# Altium PCB PCB1.PcbDoc
Units mil, origin at the board's own origin, x right, y up, seen from the top; angles counter-clockwise.
Board outline 535 x 1635 mil, 2 copper layers (Top Layer, Bottom Layer); 11 components, 8 nets, 24 pads, 1 vias.
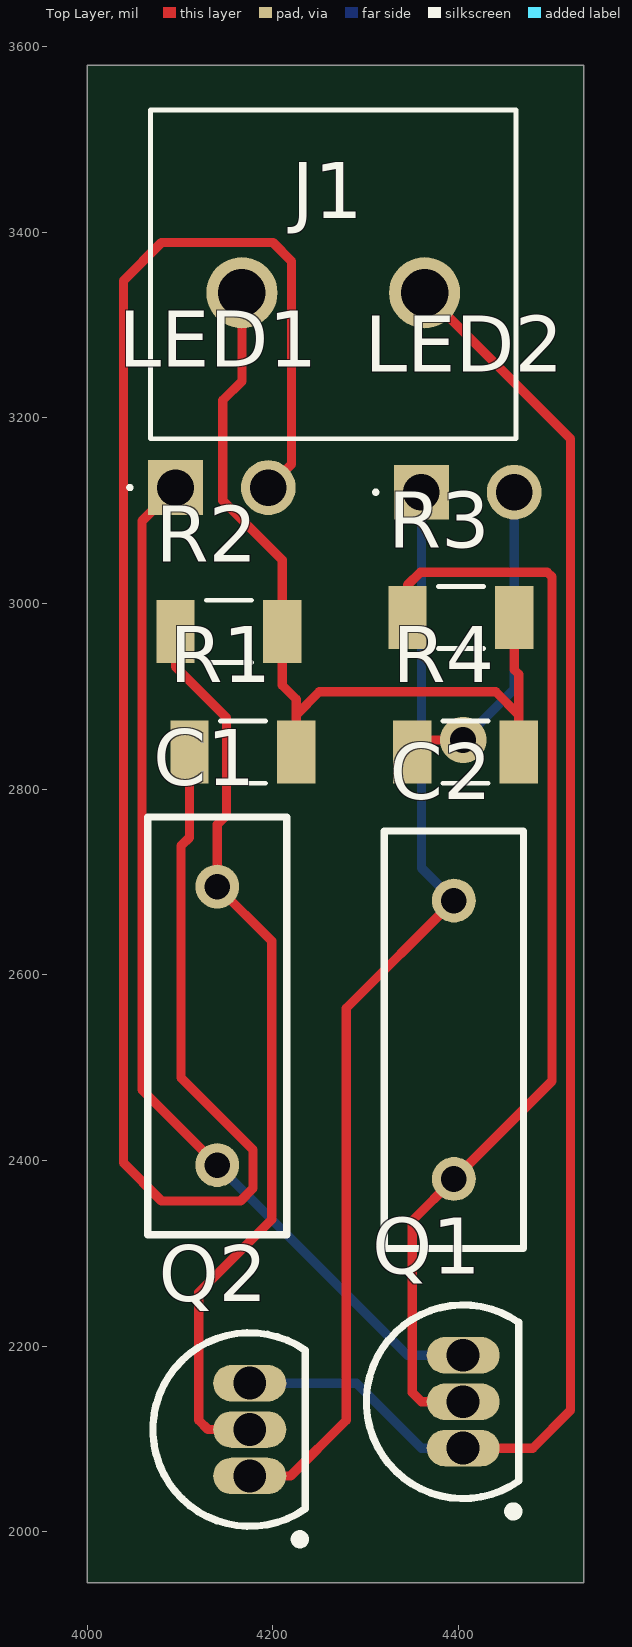
[diagram p0: Top Layer view]
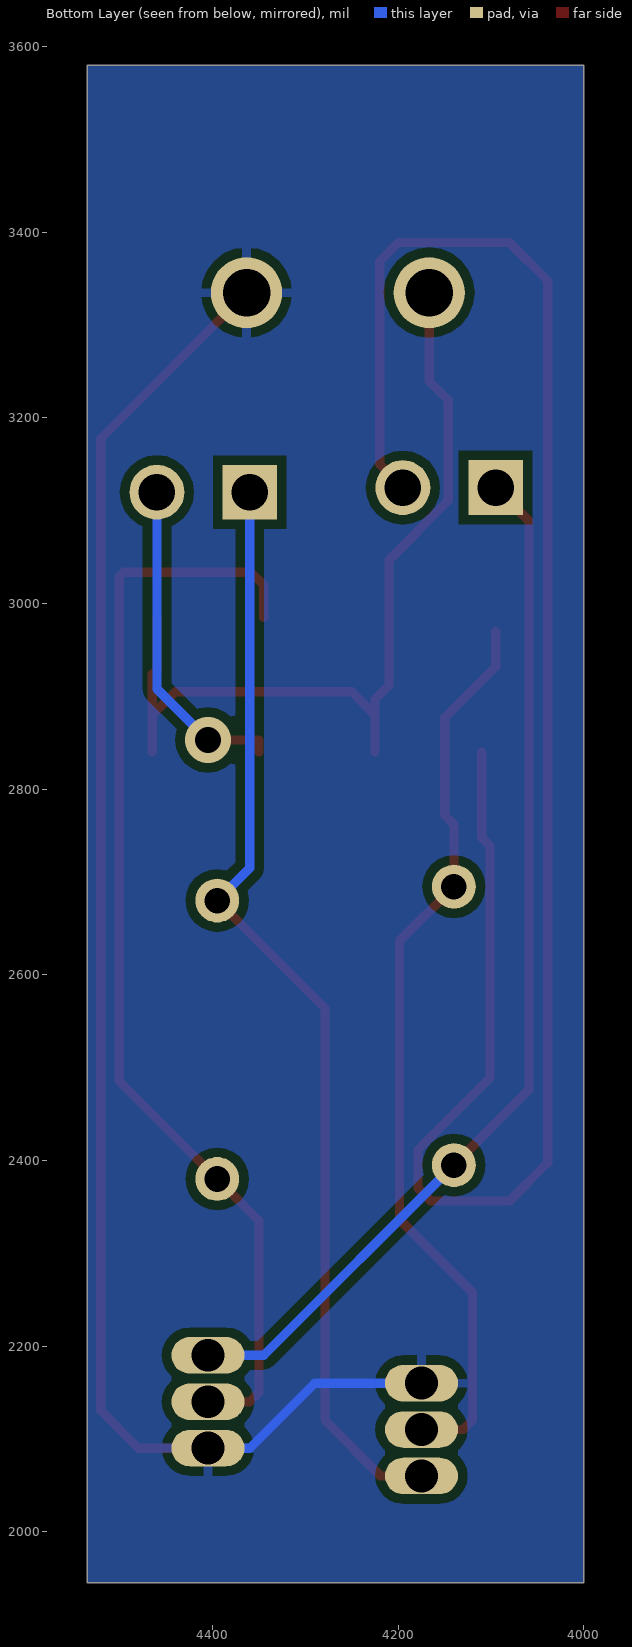
[diagram p1: Bottom Layer view, seen from below]
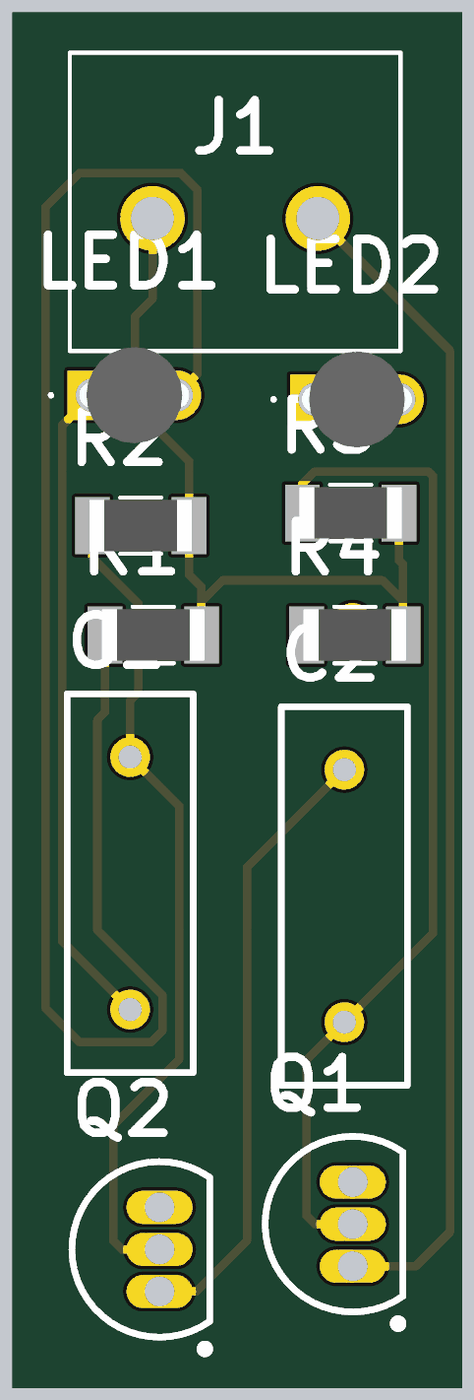
[diagram p2: 3D render of the assembled board from above, using the file's embedded part models]

## Layer stack, top to bottom
Top Solder: solder mask 0.4, Solder Resist, Dk 3.5
Top Layer: signal copper 1.4
Dielectric 1: dielectric 12.6, FR-4, Dk 4.8
Bottom Layer: signal copper 1.4
Bottom Solder: solder mask 0.4, Solder Resist, Dk 3.5

## Board outline
4000,1945 4535,1945 4535,3580 4000,3580

## Design rules (kind name [scope] priority, off if disabled: settings)
Clearance [All] p1: gap=10 ignorepadtopadclearanceinfootprint=FALSE except(0: Arc-Hole Track-Hole SMDPad-Hole THPad-Hole Via-Hole Fill-Hole Poly-Hole Region-Hole Text-Hole)
PolygonConnect [All] p1: connectstyle=Relief reliefconductorwidth=10 reliefentries=4 polygonreliefangle="90 Angle" airgapwidth=10
RoutingVias [All] p1: holewidth=28 width=50 viastyle="Through Hole" minholewidth=28 minwidth=50 maxholewidth=28 maxwidth=50
SolderMaskExpansion [All] p1: expansion=4 istentingtop=FALSE
Width [All] p1: maxlimit=10 minlimit=10 preferedwidth=10
30 further rules are at their usual default settings.

## Components (designator, comment, footprint, x,y, rotation, side; value= is the part's Value field where it differs from the comment)
C1 "Cap" RAD-0.3 4140,2545 r90 top value=100pF
C2 "Cap" RAD-0.3 4395,2530 r90 top value=100pF
J1 "691101710002" 691101710002 4265,3335 r0 top
LED1 "15400385A3590" 15400385A3590 4095,3125 r0 top
LED2 "15400385A3590" 15400385A3590 4360,3120 r0 top
Q1 "NPN" TO-226-AA 4405,2140 r0 top
Q2 "NPN" TO-226-AA 4175,2110 r0 top
R1 "CRG1206F1K0/10" RESC3115X65N 4167.52,2840 r0 top
R2 "CRG1206F1K0/10" RESC3115X65N 4152.52,2970 r0 top
R3 "CRG1206F1K0/10" RESC3115X65N 4402.52,2985 r0 top
R4 "CRG1206F1K0/10" RESC3115X65N 4407.52,2840 r0 top

## Footprints (in the part's own frame and the unit in brackets; to place one, negate y for a bottom-side part, rotate by r counter-clockwise, add the part's x,y. Pads: shape width x height; smd on the part's side, far side on the other; paste and mask are expansions set on the pad)
15400385A3590 [mm]
  rect 1.5x1.5 hole 1: 1(0,0)
  round 1.5 hole 1: 2(2.54,0)
  silkscreen extent -1.3,-0.05 -1.2,0.05, body extent -0.4,-1.45 2.94,1.45, height 11
691101710002 [mm]
  round 1.95 hole 1.3: 1(-2.5,0) 2(2.5,0)
  silkscreen extent -5,-4 5,5
RAD-0.3 [mm] "Radial Cap, Thru-Hole; 2 Leads; 0.3 in Pin Spacing"
  round 1.2 hole 0.7: 1(-3.81,0) 2(3.81,0)
  silkscreen extent -5.71,-1.91 5.71,1.91
RESC3115X65N [mm]
  rect 1.05x1.72 smd: 1(-1.46,0) 2(1.46,0)
  silkscreen extent -0.62,-0.85 0.62,0.85, body extent -1.55,-0.77 1.55,0.77, height 0.65
TO-226-AA [mm] "TO, Flat Index; 3 In-Line, Axial Leads; Body Dia. 4.8mm; Leads 0.55 x 0.51 mm (max)"
  oval 2x1 hole 0.9: 1(0,-1.27) 2(0,0) 3(0,1.27)
  silkscreen extent -2.65,-3.13 1.52,2.65, body extent -2.65,-2.66 1.52,2.66, height 5.33

## Part data
C1 C2: "Capacitor", LatestRevisionDate=17-Jul-2002, LatestRevisionNote="Re-released for DXP Platform.", PackageDescription="Radial Cap, Thru-Hole; 2 Leads; 0.3 in Pin Spacing", PackageReference=RAD-0.3, Published=8-Jun-2000, Publisher="Altium Limited"
J1: "2 Position Wire to Board Terminal Block Horizontal with Board 0.197 (5.00mm) Through Hole", Package=None, Availability="In Stock", Check_prices=https://www.snapeda.com/parts/691101710002/Wurth+Elektronik/view-part/?ref=eda, MF="WÃ¼rth Elektronik", MP=691101710002, Price=None, Purchase-URL=https://pricing.snapeda.com/search/part/691101710002/?ref=eda, SnapEDA_Link=https://www.snapeda.com/parts/691101710002/Wurth+Elektronik/view-part/?ref=snap
LED1 LED2: "LED", Manufacturer_Name="Wurth Elektronik", Mouser Part Number=710-15400385A3590, Datasheet Link=https://www.we-online.com/katalog/datasheet/15400385A3590.pdf, Height=10.9mm, Manufacturer_Part_Number=15400385A3590, Mouser Price/Stock=https://www.mouser.co.uk/ProductDetail/Wurth-Elektronik/15400385A3590?qs=5aG0NVq1C4yszs1ddn0oOg%3D%3D
Q1 Q2: "NPN Bipolar Transistor", Code_JEDEC=TO-226-AA, LatestRevisionDate=17-Jul-2002, LatestRevisionNote="Re-released for DXP Platform.", PackageDescription="TO, Flat Index; 3 In-Line, Axial Leads; Body Dia. 4.8mm; Leads 0.55 x 0.51 mm (max)", PackageReference=TO-226-AA, Published=8-Jun-2000, Publisher="Altium Limited"
R1 R2 R3 R4: "Res KalÄ±n Film 1206 1K Ohm 1% 1 / 4W Â± 100ppm / Â° C KalÄ±plÄ± SMD SMD", Package=1206, Power_Rating=".25 W", Resistance=1K, Tolerance=1%, Voltage_Rating="200 V", Availability=Warning, EU_RoHS_Compliance="Compliant with Exemptions", MF="TE Connectivity", MP=CRG1206F1K0/10, Price=None, Purchase-URL=https://pricing.snapeda.com/search/part/CRG1206F1K0/10/?ref=eda, SnapEDA_Link=https://www.snapeda.com/parts/CRG1206F1K0/10/TE%20Connectivity%20Passive%20Product/view-part/981079/?ref=snap

## Via types
v1: diameter 50, hole 28, Top Layer to Bottom Layer, 1 vias

## Nets (pads, with @x,y where several pads share a name; then routed paths per layer and width w, separated by ;. In a path a pad name is that pad's centre, name@x,y a point inside that pad or via, vN(x,y) a via of type N, cw(c..) or ccw(c..) an arc to the next point about the centre after c; other vN are vias at no path point)
GND: J1.2 Q1.1 Q2.3 | length 1661
  Top Layer w10: J1.2 4520.67,3177.75 4520.67,2130.67 4480,2090 Q1.1
  Bottom Layer w10: Q2.3 4290,2160 4360,2090 Q1.1
NetC1_1: C1.1 LED1.1 Q1.3 | length 1128.4
  Top Layer w10: LED1.1 4059,3089 4059,2476 C1.1
  Bottom Layer w10: C1.1 4345,2190 Q1.3
NetC1_2: C1.2 Q2.2 R2.1 | length 992.9
  Top Layer w10: R2.1 4095.04,2932 4150,2877.04 4150,2772 4140,2762 C1.2 4198.62,2636.38 4198.62,2336.38 4120,2257.76 4120,2120 4130,2110 Q2.2
NetC2_1: C2.1 Q1.2 R3.1 | length 1198.9
  Top Layer w10: R3.1 4345.04,3020 4358.9,3033.86 4495.67,3033.86 4500.67,3028.86 4500.67,2485.67 C2.1 4350,2335 4350,2150 4360,2140 Q1.2
NetC2_2: C2.2 LED2.1 Q2.1 | length 1191.4
  Top Layer w10: Q2.1 4219,2060 4279,2120 4279,2564 C2.2
  Bottom Layer w10: LED2.1 4360,2715 C2.2
NetLED1_2: LED1.2 R1.1 | length 2079.4
  Top Layer w10: R1.1 4110.04,2748.04 4101,2739 4101,2489 4178.62,2411.38 4178.62,2370 4165,2356.38 4080,2356.38 4039,2397.38 4039,3348 4080,3389 4200,3389 4220,3369 4220,3150 LED1.2
NetLED2_2: LED2.2 R4.1 | length 357.7
  Top Layer w10: R4.1 4350.04,2853 v1(4405,2853)
  Bottom Layer w10: v1(4405,2853) 4460,2908 LED2.2
VCC: J1.1 R1.2 R2.2 R3.2 R4.2 | length 944
  Top Layer w10: J1.1 4166.57,3239.57 4146,3219 4146,3111 4210,3047 R2.2 4210,2912 4225,2897 4225,2880 ; R1.2 4225,2880 ; R3.2 4460,2928.86 4465,2923.86 4465,2880 ; R4.2 4465,2880 ; 4225,2880 4250,2905 4440,2905 4465,2880

## Polygon pours and split planes (outlines as drawn)
GND on Bottom Layer "GND_L02_P000" (solid, remove dead copper, pour order 0): 4000,1945 4535,1945 4535,3580 4000,3580

## Text inside footprints (layer, text, board x,y; h text height)
J1: Mechanical 13 "1" at 4166.5,3236.5 h50.04